# EAGLE board StasDuino_Rev2 (EAGLE 9.5.2)
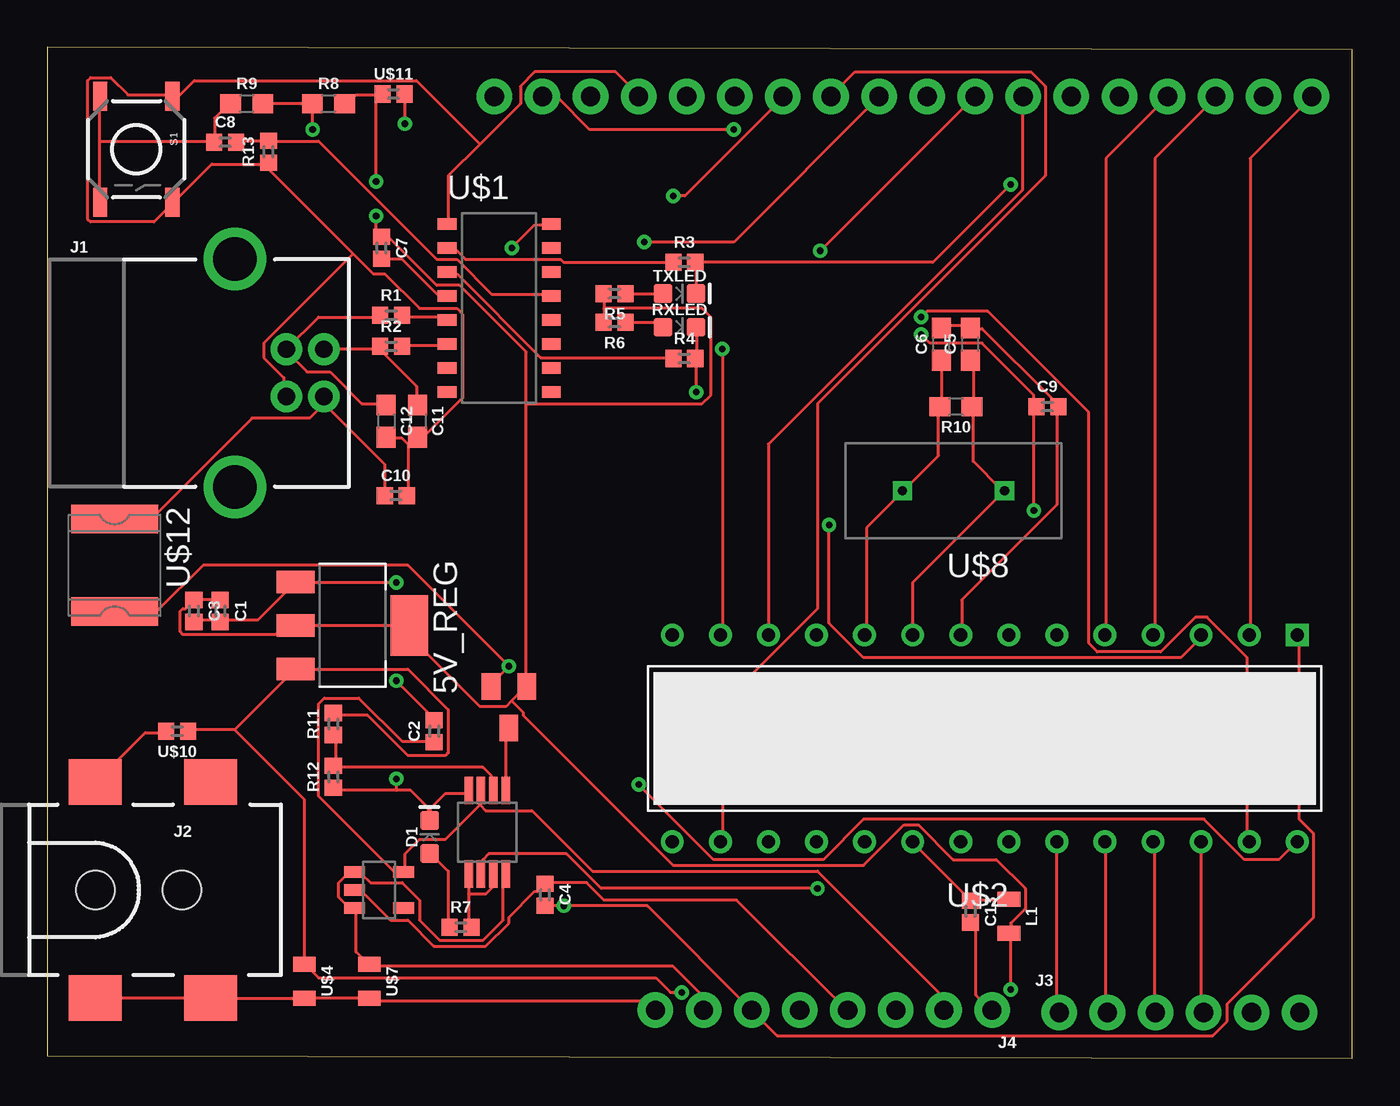
[diagram p0: board, top side]
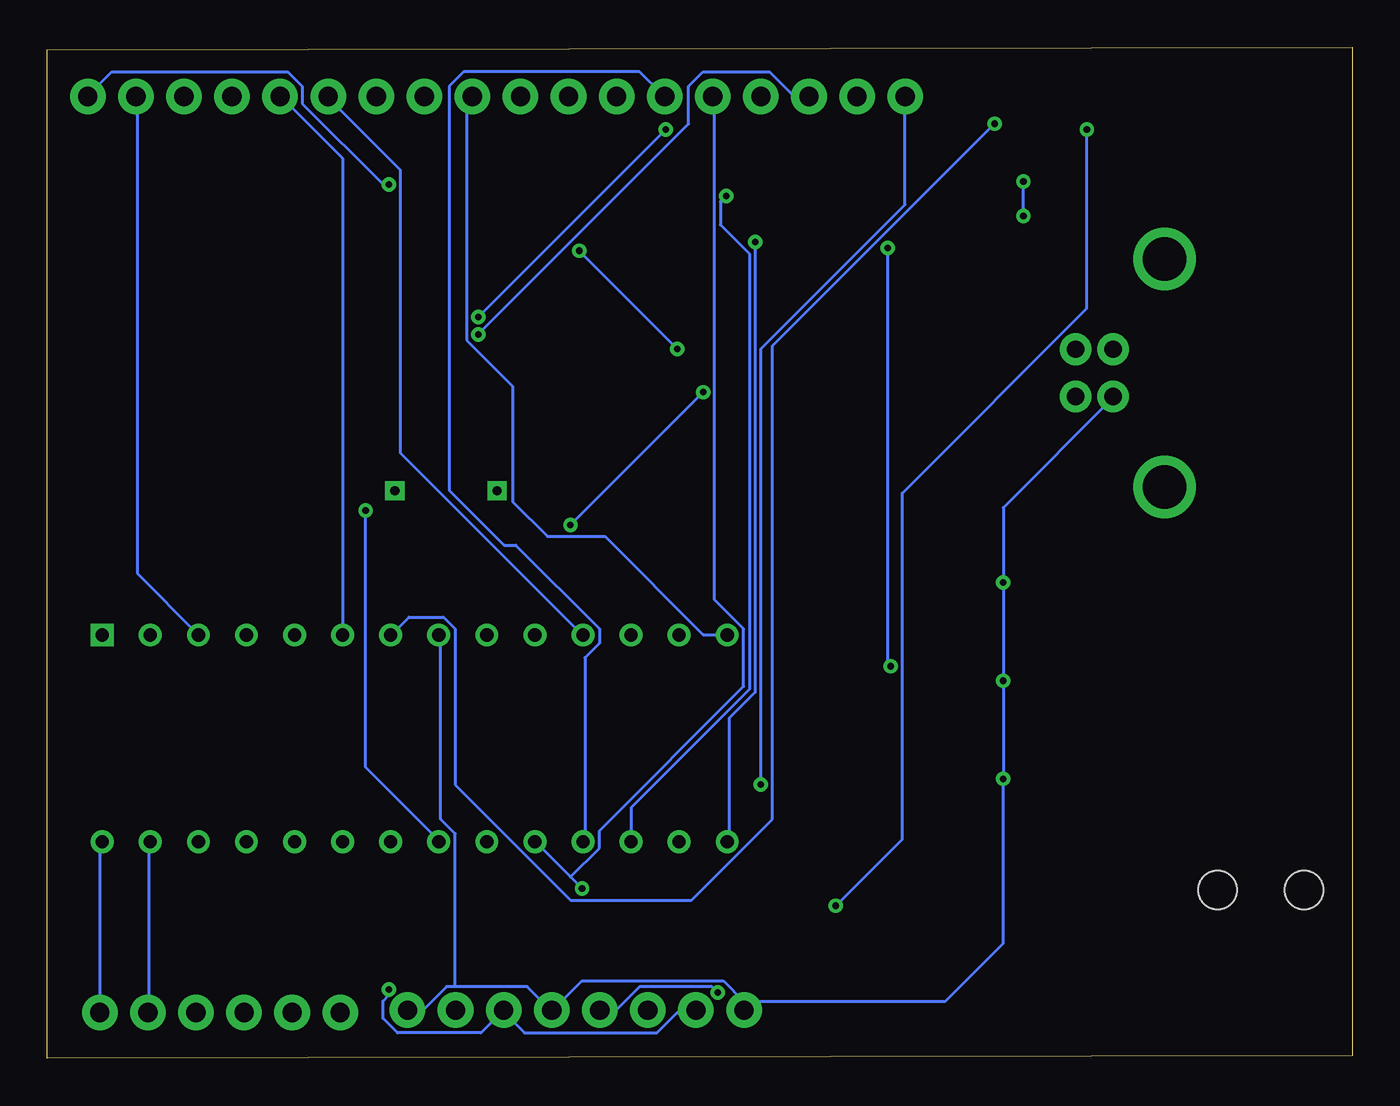
[diagram p1: board, bottom side, seen from below]

Size 68.94 x 53.39 mm. Coordinates in mm from the lower left corner, seen from the top.
Outline: 0,0.13 68.94,0 68.94,53.26 0,53.39 0,0.13
Copper layers (1*16): Top 0.035mm / dielectric 1.5mm / Bottom 0.035mm
Design rules "default": minimum track width 6mil, minimum drill 0.35mm, track to track 6mil, track to pad 6mil, pad to pad 6mil, via to via 6mil, smd to smd 6mil, copper to edge 40mil, drill to drill 6mil, minimum pad ring 10mil, minimum via ring 8mil, stop-mask expansion 4mil, vias tented up to drill 0mil, thermal gap 10mil

## Footprints (pad centres in the part's own frame; a part is rotated, then mirrored left to right if it is on the bottom)
3V3-REGULATOR = smd 1.1 x 0.6: P$1 -1.3,0.95; P$2 -1.3,0; P$3 -1.3,-0.95; P$4 1.3,-0.95; P$5 1.3,0.95
5V_REGULATOR = smd 1.2 x 2: P$1 -2.3,-3; P$2 0,-3; P$3 2.3,-3 | smd 3.2 x 2: P$2B 0,3
0402 = smd 0.85 x 0.9: 1 -0.58,0; 2 0.58,0
0603 = smd 1.1 x 1: 1 -0.85,0; 2 0.85,0
LED-0603 = smd 1 x 1: A -0.877,0; C 0.877,0
USB-B-PTH = drill 0.914 pad 1.676: D+ 4,1.25; D- 5.981,1.25; GND 4,-1.25; VBUS 5.981,-1.25 | drill 2.286: SHLD1 1.282,-6.02; SHLD2 1.282,6.02
POWER_JACK_SMD = smd 2.8 x 2.4: GND 0,-5.7; P$4 6.1,-5.7; VIN0 0,5.7; VIN1 6.1,5.7 | hole 2.032: 0,0; 4.572,0
1X06_NO_SILK = drill 1.016 pad 1.88: 1 0,0; 2 2.54,0; 3 5.08,0; 4 7.62,0; 5 10.16,0; 6 12.7,0
1X08_NO_SILK = drill 1.016 pad 1.88: 1 0,0; 2 2.54,0; 3 5.08,0; 4 7.62,0; 5 10.16,0; 6 12.7,0; 7 15.24,0; 8 17.78,0
1X18_NO_SILK = drill 1.016 pad 1.88: 1 0,0; 2 2.54,0; 3 5.08,0; 4 7.62,0; 5 10.16,0; 6 12.7,0; 7 15.24,0; 8 17.78,0; 9 20.32,0; 10 22.86,0; 11 25.4,0; 12 27.94,0; 13 30.48,0; 14 33.02,0; 15 35.56,0; 16 38.1,0; 17 40.64,0; 18 43.18,0
0805 = smd 0.8 x 1.2: 1 -0.9,0; 2 0.9,0
PMOSFET = smd 1 x 1.4: P$1 0,1.1; P$2 -0.95,-1.1; P$3 0.95,-1.1
TACTILE-SWITCH-SMD = smd 1.524 x 0.762: 1 -2.794,1.905; 2 2.794,1.905; 3 -2.794,-1.905; 4 2.794,-1.905
CH340G/C = smd 1 x 0.6: P$1 -2.75,4.445; P$2 -2.75,3.175; P$3 -2.75,1.905; P$4 -2.75,0.635; P$5 -2.75,-0.635; P$6 -2.75,-1.905; P$7 -2.75,-3.175; P$8 -2.75,-4.445; P$9 2.75,-4.445; P$10 2.75,-3.175; P$11 2.75,-1.905; P$12 2.75,-0.635; P$13 2.75,0.635; P$14 2.75,1.905; P$15 2.75,3.175; P$16 2.75,4.445
ATMEGA328P = drill 0.7 square: P$1 -16.51,-5.461 | drill 0.7: P$2 -13.97,-5.461; P$3 -11.43,-5.461; P$4 -8.89,-5.461; P$5 -6.35,-5.461; P$6 -3.81,-5.461; P$7 -1.27,-5.461; P$8 1.27,-5.461; P$9 3.81,-5.461; P$10 6.35,-5.461; P$11 8.89,-5.461; P$12 11.43,-5.461; P$13 13.97,-5.461; P$14 16.51,-5.461; P$15 16.51,5.461; P$16 13.97,5.461; P$17 11.43,5.461; P$18 8.89,5.461; P$19 6.35,5.461; P$20 3.81,5.461; P$21 1.27,5.461; P$22 -1.27,5.461; P$23 -3.81,5.461; P$24 -6.35,5.461; P$25 -8.89,5.461; P$26 -11.43,5.461; P$27 -13.97,5.461; P$28 -16.51,5.461
DUAL_OPAMP = smd 0.45 x 1.45: P$1 -0.975,-2.2; P$2 -0.325,-2.2; P$3 0.325,-2.2; P$4 0.975,-2.2; P$5 0.975,2.2; P$6 0.325,2.2; P$7 -0.325,2.2; P$8 -0.975,2.2
CRYSTAL = drill 0.5 square: P$1 -2.7,0; P$2 2.7,0
MF-SMDF050 = smd 1.5 x 4.6: 1 -2.45,0; 2 2.45,0

## Placement (x,y rotation side)
3V3_REG  3V3  [3V3-REGULATOR]  17.53,8.89 0 top
5V_REG  5V  [5V_REGULATOR]  16.13,22.86 270 top
C1  0.1uF  [0402]  9.14,23.62 270 top
C2  1.0uF  [0402]  20.45,17.27 90 top
C3  0.1uF  [0402]  7.75,23.62 270 top
C4  0.1uF  [0402]  26.29,8.64 270 top
C5  9.0pF  [0603]  48.77,37.72 90 top
C6  9.0pF  [0603]  47.24,37.72 90 top
C7  0.1uF  [0402]  17.65,42.8 270 top
C8  0.1uF  [0402]  9.4,48.39 0 top
C9  0.1uF  [0402]  52.83,34.42 0 top
C10  0.1uF  [0402]  18.41,29.72 0 top
C11  4.7pF  [0603]  19.56,33.66 270 top
C12  4.7pF  [0603]  17.91,33.66 270 top
C13  0.1uF  [0402]  48.77,7.75 270 top
D1  POWER_LED  [LED-0603]  20.19,11.68 90 top
J1  USB_B_PTH  [USB-B-PTH]  8.64,36.2 0 top
J2  5.5x2.1mm Barrel  [POWER_JACK_SMD]  2.54,8.89 0 top
J3  ANALOG_I/O  [1X06_NO_SILK]  53.47,2.41 0 top
J4  POWER PINS  [1X08_NO_SILK]  49.91,2.54 180 top
J5  DIGITAL_I/O  [1X18_NO_SILK]  66.8,50.8 180 top
L1  3.3µH/±20%/450mA  [0805]  50.8,7.49 270 top
PMOS  PMOS  [PMOSFET]  24.38,18.54 180 top
R1  22  [0402]  18.16,39.24 0 top
R2  22  [0402]  18.16,37.59 0 top
R3  1KOHM-0402-1/16W-1%  [0402]  33.66,42.04 0 top
R4  1KOHM-0402-1/16W-1%  [0402]  33.66,36.96 0 top
R5  1KOHM-0402-1/16W-1%  [0402]  29.97,40.39 180 top
R6  1KOHM-0402-1/16W-1%  [0402]  29.97,38.86 180 top
R7  1KOHM-0402-1/16W-1%  [0402]  21.84,6.92 0 top
R8  4.7k  [0603]  14.86,50.42 0 top
R9  330  [0603]  10.54,50.42 0 top
R10  1M  [0603]  48.01,34.42 180 top
R11  10k  [0402]  15.11,17.65 90 top
R12  10k  [0402]  15.11,14.86 90 top
R13  1KOHM-0402-1/16W-1%  [0402]  11.68,47.88 90 top
RXLED  RX_LED  [LED-0603]  33.4,38.61 0 top
S1  TAC_SWITCHSMD  [TACTILE-SWITCH-SMD]  4.7,48.01 270 top
TXLED  TX_LED  [LED-0603]  33.4,40.39 0 top
U$1  SERIAL  [CH340G/C]  23.88,39.62 0 top
U$2  MCU  [ATMEGA328P]  49.53,16.89 180 top
U$3  OPAMP  [DUAL_OPAMP]  23.24,11.94 180 top
U$4  47uF/6.3V  [0805]  13.59,4.06 270 top
U$7  47uF/6.3V  [0805]  17.02,4.06 270 top
U$8  16MHz  [CRYSTAL]  47.88,29.97 180 top
U$10  Reverse voltage protection  [0402]  6.86,17.27 180 top
U$11  Current protection  [0402]  18.29,50.93 0 top
U$12  FUSE050  [MF-SMDF050]  3.56,26.04 270 top

## Library data of the parts
3V3_REG 5V_REG D1 J5 PMOS RXLED TXLED U$1-U$3 U$8 U$10-U$12 = StasDuino_Lib
C1 C3 C4 C7-C10 C13 = StasDuino_Lib; PROD_ID: CAP-12416
C2 = StasDuino_Lib; PROD_ID: CAP-12417
C5 C6 = SparkFun-Capacitors; PROD_ID: CAP-09341
C11 C12 = SparkFun-Capacitors; PROD_ID: CAP-07880
J1 = StasDuino_Lib; PROD_ID: CONN-08278; SF_ID: PRT-00139
J2 = StasDuino_Lib; PROD_ID: CONN-08106; SF_ID: PRT-12748
J3 = StasDuino_Lib; PROD_ID: CONN-08437
J4 = StasDuino_Lib; PROD_ID: CONN-08438
L1 = SparkFun-Coils; PROD_ID: NDUC-13076
R1 R2 = StasDuino_Lib; PROD_ID: RES-12427
R3-R7 R13 = StasDuino_Lib; PROD_ID: RES-14342
R8 = StasDuino_Lib; PROD_ID: RES-07857
R9 = StasDuino_Lib; PROD_ID: RES-00818
R10 = StasDuino_Lib; PROD_ID: RES-07868
R11 R12 = StasDuino_Lib; PROD_ID: RES-14241
S1 = StasDuino_Lib; PROD_ID: SWCH-08247
U$4 U$7 = StasDuino_Lib; PROD_ID: CAP-13854

## Nets
3.3V: 3V3_REG.P$5 C2.1 J4.2 U$3.P$3
5V: 3V3_REG.P$1 3V3_REG.P$3 5V_REG.P$2 5V_REG.P$2B C1.1 C3.1 C7.1 J4.3 J4.7 L1.2 PMOS.P$2 R5.2 R6.2 R8.2 U$3.P$8 U$7.1 U$11.1
D+: R1.2 U$1.P$5
GND: 3V3_REG.P$2 5V_REG.P$1 C1.2 C2.2 C3.2 C4.1 C5.2 C6.2 C9.2 C10.2 C11.2 C12.2 C13.2 D1.C J1.GND J2.GND J2.P$4 J4.1 J4.4 J4.8 J5.15 R12.1 R13.1 S1.1 S1.2 U$1.P$1 U$2.P$8 U$3.P$4 U$4.2 U$7.2
N$1: C12.1 J1.D+ R1.1
N$2: C4.2 J4.6 R8.1 R9.2 U$2.P$1
N$3: C11.1 J1.D- R2.1
N$4: R2.2 U$1.P$6
N$5: J5.2 R4.2 RXLED.C U$2.P$3
N$6: J5.1 R3.2 TXLED.C U$2.P$2
N$7: C8.1 R9.1 S1.3 S1.4
N$8: R5.1 TXLED.A
N$9: R6.1 RXLED.A
N$10: D1.A R7.1
N$11: R7.2 U$3.P$5 U$3.P$7
N$12: C5.1 R10.1 U$2.P$9 U$8.P$1
N$13: C6.1 R10.2 U$2.P$10 U$8.P$2
N$14: J3.6 J5.18 U$2.P$28
N$15: PMOS.P$1 U$3.P$1
N$16: J2.VIN0 U$10.2
N$17: R11.1 R12.2 U$3.P$2
N$18: C7.2 U$1.P$4
N$19: C8.2 R13.2 U$1.P$13
N$20: U$2.P$7 U$11.2
N$21: J3.5 J5.17 U$2.P$27
N$22: J3.4 U$2.P$26
N$23: J3.3 U$2.P$25
N$24: J3.2 U$2.P$24
N$25: J3.1 U$2.P$23
N$26: J5.3 U$2.P$4
N$27: J5.4 U$2.P$5
N$28: J5.5 U$2.P$6
N$29: J5.6 U$2.P$11
N$30: J5.7 U$2.P$12
N$31: J5.8 U$2.P$13
N$32: J5.9 U$2.P$14
N$33: J5.10 U$2.P$15
N$34: J5.11 U$2.P$16
N$35: J5.12 U$2.P$17
N$36: J5.13 U$2.P$18
N$38: C9.1 J5.16 U$2.P$21
N$39: C10.1 J1.VBUS U$12.1
N$40: C13.1 L1.1 U$2.P$20
RX: R4.1 U$1.P$3
SCK: J5.14 U$2.P$19 U$3.P$6
TX: R3.1 U$1.P$2
V_USB: PMOS.P$3 U$1.P$16 U$12.2
VIN: 5V_REG.P$3 J4.5 R11.2 U$4.1 U$10.1

## Tracks (layer width: path | path; a pad name or v marks a point on that pad's centre or on a via)
3.3V
  Top 0.152: C2.1 20.42,16.74 18.75,16.74 16.46,19.02 14.63,19.02 14.33,18.72 14.33,13.84 18.29,9.88 18.75,9.88 3V3_REG.P$5 18.9,9.88 18.9,10.79 19.66,11.56 21.03,11.56 22.86,13.39 | 22.86,13.39 22.86,14 U$3.P$3 | 22.86,13.39 23.16,13.08 25.6,13.08 28.8,9.88 40.69,9.88 47.24,3.33 47.24,2.57 J4.2
  Top 0.254: 20.57,16.56 C2.1
5V  (via drill 0.35)
  Top 0.152: U$3.P$8 24.08,9.73 24.08,7.29 23.01,6.22 20.73,6.22 19.66,7.29 19.66,8.36 18.75,9.27 17.07,9.27 16.61,9.73 16.31,9.73 3V3_REG.P$1 16.15,9.73 15.85,9.73 15.39,9.27 15.39,8.51 15.85,8.05 16.15,8.05 3V3_REG.P$3 16.31,7.9 16.31,5.61 16.92,5 U$7.1 17.07,4.85 33.07,4.85 34.59,3.33 34.59,2.57 J4.7 | v50.9,3.63 50.9,6.53 L1.2 50.9,6.68 50.9,7.14 51.66,7.9 51.66,8.97 50.14,10.49 47.85,10.49 46.02,12.32 45.26,12.32 43.13,10.19 33.07,10.19 25.15,18.11 25.15,18.26 24.54,18.87 | C1.1 7.77,24.21 C3.1 7.62,24.05 7.32,23.75 7.16,23.75 7.01,23.6 7.01,22.53 7.16,22.38 12.04,22.38 12.5,22.83 5V_REG.P$2 13.26,22.83 19.05,22.83 5V_REG.P$2B 19.2,22.83 19.2,22.22 22.86,18.57 24.23,18.57 24.54,18.87 | 17.37,50.88 16.31,50.88 15.85,50.42 R8.2 | 17.37,50.88 17.68,50.88 U$11.1 17.37,50.88 | 29.41,39.6 29.41,40.36 R5.2 | 29.41,39.6 29.41,38.99 R6.2 | 25.3,34.57 25.3,19.79 PMOS.P$2 25.3,19.63 24.54,18.87 | 25.3,34.57 25.3,37.31 21.79,40.82 20.57,40.82 18.14,43.26 17.68,43.26 C7.1 17.53,43.41 17.37,43.56 v17.37,44.48 | 29.41,39.6 34.59,39.6 35.05,39.14 35.05,35.03 34.59,34.57 25.3,34.57 | v17.37,46.3 17.37,50.88
  Top 0.254: 29.14,38.61 R6.2 | 17.65,50.87 U$11.1 | 5V_REG.P$2 12.57,22.86 | 9.2,24.26 C1.1
  Bottom 0.152: v50.9,3.63 50.9,3.33 51.21,3.02 51.21,2.11 50.44,1.35 46.02,1.35 J4.3 44.81,2.41 43.74,1.35 36.73,1.35 35.66,2.41 34.75,2.41 J4.7 | v17.37,44.48 v17.37,46.3
D+
  Top 0.152: R1.2 18.75,39.14 20.88,39.14 21.03,38.99 U$1.P$5
GND  (via drill 0.35)
  Top 0.152: 22.14,14.01 U$3.P$4 22.1,14 21.03,14 20.27,13.23 20.19,13.2 20.12,13.23 19.2,14.15 18.44,14.15 | 9.14,23.14 7.77,23.14 C3.2 | 9.14,23.14 11.12,23.14 13.11,25.12 5V_REG.P$1 13.26,25.12 v18.44,25.12 | 9.14,23.14 C1.2 | 18.44,14.15 15.24,14.15 R12.1 | v18.44,19.94 20.42,17.96 C2.2 | v18.44,14.76 18.44,14.15 | 22.86,48.29 24.99,50.42 24.99,51.33 25.76,52.1 30.02,52.1 31.24,50.88 J5.15 | 22.86,48.29 21.18,46.61 21.18,44.17 U$1.P$1 | 19.05,32.44 19.05,29.84 C10.2 | 19.05,32.44 19.36,32.74 C11.2 19.66,32.89 19.96,32.89 21.95,34.87 21.95,39.29 21.64,39.6 19.66,39.6 17.83,41.43 17.22,41.43 16.15,42.49 | 19.05,32.44 18.75,32.74 17.98,32.74 C12.2 | 11.43,47.22 8.69,47.22 6.71,45.24 S1.2 6.55,45.09 5.64,44.17 2.29,44.17 2.13,44.32 2.13,51.64 2.29,51.79 3.35,51.79 4.27,50.88 6.55,50.88 S1.1 6.86,50.72 7.77,51.64 19.51,51.64 22.86,48.29 | 11.43,47.22 11.58,47.22 R13.1 11.43,47.22 | 11.43,47.22 16.15,42.49 | 16.15,42.49 11.43,37.77 11.43,37.01 12.5,35.94 12.5,35.03 J1.GND | 53.34,34.42 53.03,34.72 53.03,34.87 49.38,38.53 48.77,38.53 C5.2 48.77,38.68 47.24,38.68 C6.2 | 53.34,34.42 53.34,29.23 48.31,24.21 48.31,22.38 U$2.P$8 | 53.34,34.42 C9.2 | J2.GND 2.59,3.17 8.53,3.17 J2.P$4 8.69,3.17 13.56,3.17 U$4.2 13.72,3.17 16.92,3.17 U$7.2 17.07,3.02 31.55,3.02 32,2.57 J4.8 | 3V3_REG.P$2 16.31,8.81 16.61,8.81 18.14,7.29 19.05,7.29 20.42,5.92 23.16,5.92 24.38,7.14 24.38,7.44 25.76,8.81 25.91,8.81 26.21,9.12 C4.1 26.52,9.27 28.5,9.27 29.41,8.36 36.42,8.36 42.22,2.57 J4.4 | C13.2 49.07,6.98 49.07,3.33 49.84,2.57 J4.1
  Top 0.254: D1.C 20.19,13.2 | C13.2 48.96,6.98 | C11.2 19.48,32.72 19.39,32.8 | C4.1 26.35,9.15 26.42,9.22 | 6.86,50.55 S1.1
  Bottom 0.152: J1.GND 12.65,34.87 18.44,29.08 v18.44,25.12 v18.44,19.94 v18.44,14.76 18.44,6.07 21.49,3.02 32.16,3.02 | 32.16,3.02 32.16,2.57 J4.8 32.16,3.02 | 32.16,3.02 33.22,4.09 40.69,4.09 42.22,2.57 J4.4 42.37,2.57 43.59,3.79 47.4,3.79 | 47.4,3.79 47.85,3.79 49.07,2.57 49.84,2.57 J4.1 | 47.4,3.79 47.4,11.86 48.16,12.62 48.16,22.22 U$2.P$8
N$1
  Top 0.152: R1.1 17.53,39.14 14.33,39.14 12.65,37.47 J1.D+ 12.65,37.31 13.72,36.25 14.94,36.25 16.61,34.57 17.83,34.57 C12.1
N$2  (via drill 0.35)
  Top 0.152: R9.2 R8.1 14.02,50.42 v14.02,49.05 | C4.2 26.36,8.05 v27.28,8.05 31.7,8.05 J4.6 38.56,1.19 61.57,1.19 62.33,1.96 62.33,2.87 66.9,7.44 66.9,11.86 66.14,12.62 66.14,22.22 U$2.P$1
  Top 0.254: 26.35,8.12 C4.2 | 14.03,50.44 R8.1
  Bottom 0.152: v14.02,49.05 14.02,39.6 23.77,29.84 23.77,11.56 v27.28,8.05
N$3
  Top 0.152: 17.53,37.47 14.63,37.47 J1.D- | 17.53,37.47 19.51,35.48 19.51,34.57 C11.1 | 17.53,37.47 R2.1
N$4
  Top 0.152: R2.2 18.9,37.62 21.03,37.62 U$1.P$6
  Top 0.254: R2.2 18.87,37.72
N$5  (via drill 0.35)
  Top 0.152: RXLED.C 34.29,38.53 34.29,37.01 R4.2 34.29,36.86 v34.29,35.18 | v41.3,28.17 41.3,22.99 43.13,21.16 59.89,21.16 60.96,22.22 U$2.P$3
  Bottom 0.152: v41.3,28.17 v34.29,35.18 | J5.2 64.16,50.72 64.16,25.58 60.96,22.38 U$2.P$3
N$6  (via drill 0.35)
  Top 0.152: TXLED.C 34.29,40.51 34.29,41.89 R3.2 46.79,42.04 v50.9,46.15 | U$2.P$2 63.55,22.38 63.55,47.52 66.75,50.72 J5.1
  Top 0.254: R3.2 34.28,41.99
  Bottom 0.152: v50.9,46.15 51.21,46.15 55.47,50.42 55.47,51.33 56.24,52.1 65.53,52.1 66.75,50.88 J5.1
N$7
  Top 0.152: R9.1 9.6,50.42 8.84,49.66 8.84,48.44 C8.1 8.69,48.44 2.74,48.44 | 2.74,48.44 2.74,50.72 S1.3 | 2.74,48.44 2.74,45.24 S1.4
N$8
  Top 0.152: R5.1 30.63,40.36 32.46,40.36 TXLED.A
N$9
  Top 0.152: R6.1 30.63,38.84 32.16,38.84 RXLED.A
  Top 0.254: RXLED.A 32.27,38.86
N$10
  Top 0.152: R7.1 21.18,6.98 21.18,9.88 20.57,10.49 D1.A
  Top 0.254: 20.51,10.49 D1.A
N$11
  Top 0.152: 22.25,8.66 22.25,9.42 U$3.P$5 | 22.25,8.66 22.25,7.14 R7.2 | 22.25,8.66 23.16,8.66 23.47,8.97 23.47,9.73 U$3.P$7
  Top 0.254: U$3.P$5 22.3,9.71 22.3,9.59 22.23,9.53 | 22.3,7.05 R7.2
N$12
  Top 0.152: 48.92,34.42 48.92,36.7 C5.1 | 48.92,34.42 48.92,31.52 50.44,30 U$8.P$1 50.44,29.84 45.72,25.12 U$2.P$9 | 48.92,34.42 R10.1
  Top 0.254: 48.86,36.78 C5.1
N$13
  Top 0.152: C6.1 47.24,34.42 R10.2 47.09,34.42 47.09,31.83 45.26,30 U$8.P$2 45.11,29.84 43.28,28.02 43.28,22.38 U$2.P$10
  Top 0.254: 47.16,36.78 C6.1
N$14  (via drill 0.35)
  Top 0.152: v31.24,14.45 35.2,10.49 41,10.49 43.13,12.62 61.11,12.62 63.25,10.49 65.08,10.49 65.99,11.41 U$2.P$28
  Bottom 0.152: U$2.P$28 66.14,11.41 66.14,2.41 J3.6 | J5.18 23.62,45.09 31.24,37.47 v31.24,14.45
N$15
  Top 0.152: PMOS.P$1 24.23,17.2 24.23,14.3 U$3.P$1
  Top 0.254: PMOS.P$1 24.26,17.31 | U$3.P$1 24.26,14.18
N$16
  Top 0.152: U$10.2 6.25,17.2 5.18,17.2 2.59,14.61 J2.VIN0
N$17
  Top 0.152: R11.1 15.24,17.04 15.24,15.52 R12.2 15.24,15.37 23.01,15.37 23.47,14.91 23.47,14.15 U$3.P$2
  Top 0.254: U$3.P$2 23.6,14.17
N$18
  Top 0.152: C7.2 17.68,42.19 18.75,42.19 20.73,40.21 U$1.P$4
  Top 0.254: U$1.P$4 20.83,40.26
N$19
  Top 0.152: C8.2 10.06,48.44 11.58,48.44 R13.2 11.73,48.44 14.33,48.44 20.57,42.19 21.64,42.19 23.47,40.36 26.52,40.36 U$1.P$13
  Top 0.254: C8.2 10.05,48.46 | 26.56,40.2 U$1.P$13
N$20  (via drill 0.35)
  Top 0.152: v18.9,49.35 18.9,50.88 U$11.2
  Bottom 0.152: v18.9,49.35 30.63,37.62 30.63,12.62 34.9,8.36 41.3,8.36 47.4,14.45 47.4,22.68 48.01,23.29 49.84,23.29 50.75,22.38 U$2.P$7
N$21  (via drill 0.35)
  Top 0.152: v36.27,49.05 28.65,49.05 26.98,50.72 26.21,50.72 J5.17 | v46.18,39.14 46.48,39.45 49.68,39.45 55.02,34.11 55.02,21.92 55.47,21.46 58.83,21.46 60.66,23.29 61.27,23.29 63.4,21.16 63.4,11.56 U$2.P$27
  Bottom 0.152: U$2.P$27 63.55,11.41 63.55,2.41 J3.5 | v46.18,39.14 v36.27,49.05
N$22
  Top 0.152: U$2.P$26 60.96,2.41 J3.4
N$23
  Top 0.152: U$2.P$25 58.52,11.41 58.52,2.41 J3.3
N$24
  Top 0.152: U$2.P$24 55.93,11.41 55.93,2.41 J3.2
N$25
  Top 0.152: U$2.P$23 53.34,2.41 J3.1
N$26
  Top 0.152: U$2.P$4 58.52,22.38 58.52,47.52 61.72,50.72 J5.3
N$27
  Top 0.152: U$2.P$5 55.93,22.38 55.93,47.52 59.13,50.72 J5.4
N$28
  Bottom 0.152: U$2.P$6 53.34,47.52 56.54,50.72 J5.5
N$29
  Bottom 0.152: U$2.P$11 40.69,22.38 50.29,31.98 50.29,46.91 54.1,50.72 J5.6
N$30
  Top 0.152: U$2.P$12 38.1,32.44 51.51,45.85 51.51,50.72 J5.7
N$31  (via drill 0.35)
  Top 0.152: v35.66,37.47 35.66,22.38 U$2.P$13 | v40.84,42.65 48.92,50.72 J5.8
  Bottom 0.152: v40.84,42.65 v35.66,37.47
N$32
  Bottom 0.152: U$2.P$14 33.07,22.38 34.29,22.38 39.47,27.56 42.52,27.56 44.35,29.39 44.35,35.48 46.79,37.92 46.79,50.42 46.48,50.72 J5.9
N$33  (via drill 0.35)
  Top 0.152: v31.55,43.1 36.27,43.1 43.89,50.72 J5.10
  Bottom 0.152: v31.55,43.1 31.55,19.33 32.92,17.96 32.92,11.56 U$2.P$15
N$34
  Top 0.152: U$2.P$16 35.66,11.56 35.66,18.72 40.69,23.75 40.69,34.57 52.73,46.61 52.73,51.33 51.97,52.1 42.67,52.1 41.45,50.88 J5.11
N$35  (via drill 0.35)
  Top 0.152: v33.07,45.54 33.68,45.54 38.86,50.72 J5.12
  Bottom 0.152: U$2.P$17 38.1,13.23 31.85,19.48 31.85,42.49 33.38,44.02 33.38,45.24 v33.07,45.54
N$36
  Bottom 0.152: U$2.P$18 40.54,11.56 40.54,21.16 39.78,21.92 39.78,22.68 44.2,27.1 44.81,27.1 47.7,30 47.7,51.33 46.94,52.1 37.64,52.1 36.42,50.88 J5.13
N$38  (via drill 0.35)
  Top 0.152: v52.12,28.93 52.12,34.42 | v46.18,38.23 46.63,37.77 49.38,37.77 52.12,35.03 52.12,34.42 | 52.12,34.42 C9.1
  Bottom 0.152: v52.12,28.93 52.12,15.37 48.31,11.56 U$2.P$21 | v46.18,38.23 35.05,49.35 35.05,51.33 34.29,52.1 30.79,52.1 29.57,50.88 28.8,50.88 J5.16
N$39
  Top 0.152: 14.63,34.57 17.83,31.37 17.83,29.84 C10.1 | 14.63,34.57 14.63,34.87 J1.VBUS 14.63,34.57 | 14.63,34.57 13.87,33.81 10.82,33.81 5.64,28.63 3.66,28.63 U$12.1
N$40
  Top 0.152: 48.77,8.36 50.75,8.36 L1.1 | 48.77,8.36 45.72,11.41 U$2.P$20 | 48.77,8.36 C13.1
RX
  Top 0.152: R4.1 33.07,37.01 26.06,37.01 21.64,41.43 21.18,41.43 U$1.P$3
SCK  (via drill 0.35)
  Top 0.152: v40.69,8.97 29.26,8.97 27.43,10.79 23.32,10.79 23.01,10.49 23.01,9.88 U$3.P$6
  Bottom 0.152: 41.3,9.58 43.13,11.41 U$2.P$19 | 41.3,9.58 v40.69,8.97 | 41.3,9.58 39.78,11.1 39.78,12.01 32.16,19.63 32.16,22.68 33.68,24.21 33.68,50.72 J5.14
TX
  Top 0.152: R3.1 27.28,42.04 27.13,42.19 22.1,42.19 21.49,42.8 U$1.P$2
V_USB  (via drill 0.35)
  Top 0.152: v24.54,42.8 25.76,44.02 26.52,44.02 U$1.P$16 | PMOS.P$3 23.47,19.79 v24.38,20.7 19.05,26.04 8.23,26.04 5.79,23.6 3.66,23.6 U$12.2
  Bottom 0.152: v24.54,42.8 24.54,20.85 v24.38,20.7
VIN  (via drill 0.35)
  Top 0.152: 9.91,17.35 7.47,17.35 U$10.1 | 9.91,17.35 13.11,20.55 5V_REG.P$3 13.26,20.55 19.05,20.55 21.18,18.41 21.18,16.13 21.03,15.98 19.05,15.98 16.92,18.11 15.24,18.11 R11.2 | 9.91,17.35 13.56,13.69 13.56,5 U$4.1 13.72,4.85 14.33,4.24 32.16,4.24 32.92,3.48 v33.53,3.48
  Bottom 0.152: v33.53,3.48 33.83,3.79 37.64,3.79 38.86,2.57 39.62,2.57 J4.5